# EAGLE board max21100_v1 (EAGLE 6.5.0)
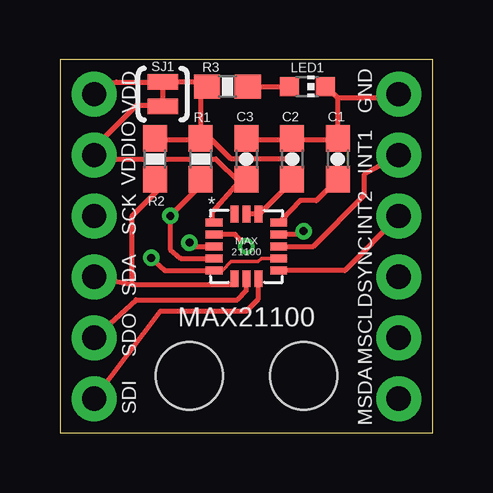
[diagram p0: board, top side]
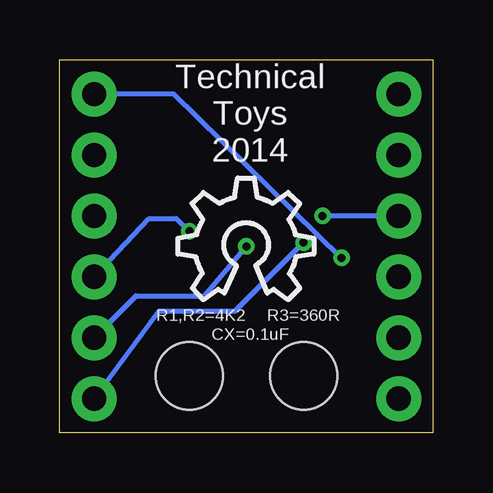
[diagram p1: board, bottom side, seen from below]

Size 15.56 x 15.56 mm. Coordinates in mm from the lower left corner, seen from the top.
Outline: 0,0 15.56,0 15.56,15.56 0,15.56 0,0
Copper layers (1*16): Top 0.0356mm / dielectric 1.5011mm / Bottom 0.0356mm
Design rules "LaenPCBOrder *": minimum track width 6mil, minimum drill 13mil, track to track 6mil, track to pad 6mil, pad to pad 6mil, via to via 6mil, smd to smd 6mil, copper to edge 15mil, drill to drill 6mil, minimum pad ring 7mil, minimum via ring 7mil, stop-mask expansion 2mil, vias tented up to drill 25mil, thermal gap 10mil
Net classes: 0 default: width 0.203 mm, clearance 0.152 mm; 1 thin: width 0.152 mm
Holes 2.8 mm at 10.16,2.38 5.4,2.38

## Footprints (pad centres in the part's own frame; a part is rotated, then mirrored left to right if it is on the bottom)
0603-CAP = smd 1.1 x 1: 1 -0.85,0; 2 0.85,0
1X06 = drill 1.016 pad 1.88: 1 0,0; 2 2.54,0; 3 5.08,0; 4 7.62,0; 5 10.16,0; 6 12.7,0
CHIP-LED0603 = smd 0.8 x 0.8: A 0,-0.75; C 0,0.75
0603-RES = smd 1.1 x 1: 1 -0.85,0; 2 0.85,0
SJ_2S-TRACE = smd 0.635 x 1.27: 1 -0.508,0; 2 0.508,0
MAX21100 = smd 0.7 x 0.33: 1 -1.35,1; 2 -1.35,0.5; 3 -1.35,0; 4 -1.35,-0.5; 5 -1.35,-1; 9 1.35,-1; 10 1.35,-0.5; 11 1.35,0; 12 1.35,0.5; 13 1.35,1 | smd 0.33 x 0.7: 6 -0.5,-1.35; 7 0,-1.35; 8 0.5,-1.35; 14 0.5,1.35; 15 0,1.35; 16 -0.5,1.35

## Placement (x,y rotation side)
C1  0.1uF  [0603-CAP]  11.59,11.43 270 top
C2  0.1uF  [0603-CAP]  9.68,11.43 270 top
C3  0.1uF  [0603-CAP]  7.78,11.43 270 top
JP1  JP1  [1X06]  1.43,14.13 270 top
JP2  JP1  [1X06]  14.13,14.13 270 top
LED1  RED  [CHIP-LED0603]  10.32,14.45 270 top
R1  4K7  [0603-RES]  5.87,11.43 90 top
R2  4K7  [0603-RES]  3.97,11.43 90 top
R3  360R  [0603-RES]  6.99,14.45 0 top
SJ1  SEPARATE VDDIO  [SJ_2S-TRACE]  4.29,14.13 270 top
U$1  MAX21100  [MAX21100]  7.78,7.78 0 top
U$2  [OSHW_8X200_NOTEXT]  10.64,5.56 0 bottom

## Library data of the parts
C1-C3 R1-R3 = SparkFun-Passives
JP1 JP2 SJ1 U$1 = max21100
LED1 = breakouts
U$2 = ohw-logo

## Nets
CS: JP1.6 U$1.8
DSYNC: JP2.4 U$1.12
GND [thin]: C1.1 C2.1 C3.1 JP2.1 LED1.C U$1.5 U$1.10
INT1: JP2.2 U$1.11
INT2: JP2.3 U$1.9
MST_SCL: JP2.5 U$1.2
MST_SDA: JP2.6 U$1.3
N$1: LED1.A R3.2
REGD: C1.2 U$1.13
SA0_SDO: JP1.5 U$1.7
SDA_CLK: JP1.3 R1.1 U$1.4
SDA_SDI: JP1.4 R2.1 U$1.6
VDD: C2.2 JP1.1 R1.2 R2.2 R3.1 SJ1.1 U$1.14 U$1.15
VDDIO: C3.2 JP1.2 SJ1.2 U$1.1

## Tracks (layer width: path | path; a pad name or v marks a point on that pad's centre or on a via)
CS
  Top 0.203: JP1.6 4.19,5.08 7.79,5.08 8.28,5.6 U$1.8
DSYNC  (via drill 0.33)
  Top 0.203: v10.16,8.41 10.03,8.28 9.18,8.28 U$1.12
  Bottom 0.203: JP2.4 11.83,8.93 10.7,8.95 v10.16,8.41
GND  (via drill 0.33)
  Top 0.152: U$1.10 9.11,7.28 8.41,7.28 8.26,7.14 7.14,7.14 6.78,6.78 U$1.5 | U$1.5 6.35,6.7 | 6.45,6.78 U$1.5
  Top 0.203: 9.21,7.3 U$1.10 | 9.68,12.22 7.78,12.22 C3.1 | 11.59,13.97 11.11,14.45 LED1.C | 11.59,13.97 C1.1 11.59,12.22 9.68,12.22 | 9.68,12.22 C2.1 | 11.59,13.97 14.13,13.97 JP2.1 | v3.81,7.3 4.39,6.78 6.45,6.78
  Bottom 0.203: v3.81,7.3 10.79,14.13 JP2.1
INT1
  Top 0.203: U$1.11 10.56,7.78 12.7,9.91 12.7,10.79 JP2.2
INT2
  Top 0.203: JP2.3 11.88,6.78 9.21,6.78 U$1.9
MST_SCL  (via drill 0.33)
  Top 0.203: v7.78,7.78 7.3,8.28 6.51,8.28 U$1.2
  Bottom 0.203: JP2.5 12.38,5.71 9.53,5.71 v7.78,7.78
MST_SDA  (via drill 0.33)
  Top 0.203: U$1.3 5.56,7.78 v5.4,7.94
  Bottom 0.203: JP2.6 11.43,5.08 8.26,5.08 v5.4,7.94
N$1
  Top 0.203: R3.2 LED1.A
REGD
  Top 0.203: C1.2 10.69,9.68 10,9.68 9.23,8.89 U$1.13
SA0_SDO
  Top 0.203: U$1.7 7.78,5.94 7.4,5.56 3.17,5.56 JP1.5
SDA_CLK  (via drill 0.33)
  Top 0.203: R1.1 5.87,10.32 v4.6,9.05 4.6,7.66 5.04,7.28 U$1.4
  Bottom 0.203: JP1.3 v4.6,9.05
SDA_SDI
  Top 0.203: 3.02,6.19 7.27,6.19 U$1.6 | 3.02,6.19 3.02,9.05 4.29,10.32 R2.1 | JP1.4 3.02,6.19
VDD
  Top 0.203: U$1.15 7.8,9.13 U$1.14 8.41,9.21 9.68,10.48 C2.2 9.68,11.43 7.14,11.43 6.35,12.22 5.87,12.22 | 5.87,12.22 3.97,12.22 R2.2 | 5.87,12.22 R1.2 5.87,14.19 R3.1 5.94,14.64 SJ1.1 2.35,14.64 2.22,14.61 1.59,14.13 JP1.1
VDDIO
  Top 0.203: SJ1.2 4.25,13.65 3.17,13.65 1.43,11.91 JP1.2 1.43,11.43 6.51,11.43 7.46,10.48 | U$1.1 6.35,8.78 6.35,9.21 7.46,10.48 | 7.46,10.48 7.78,10.64 C3.2 7.46,10.48

## Text on the board
tPlace: VDDIO | VDD | GND | INT1 | SCK | INT2 | SDA | DSYNC | MAX21100 | SDO | MSCL | SDI | MSDA
bPlace: Technical / Toys / 2014 | R3=360R | R1,R2=4K2 | CX=0.1uF
tNames: LED1